# Altium PCB Micro.PcbDoc
Units mil, origin at the board's own origin, x right, y up, seen from the top; angles counter-clockwise.
Board outline 3937.01 x 3937.01 mil, 2 copper layers (Top Layer, Bottom Layer); 81 components, 145 nets, 413 pads, 89 vias.
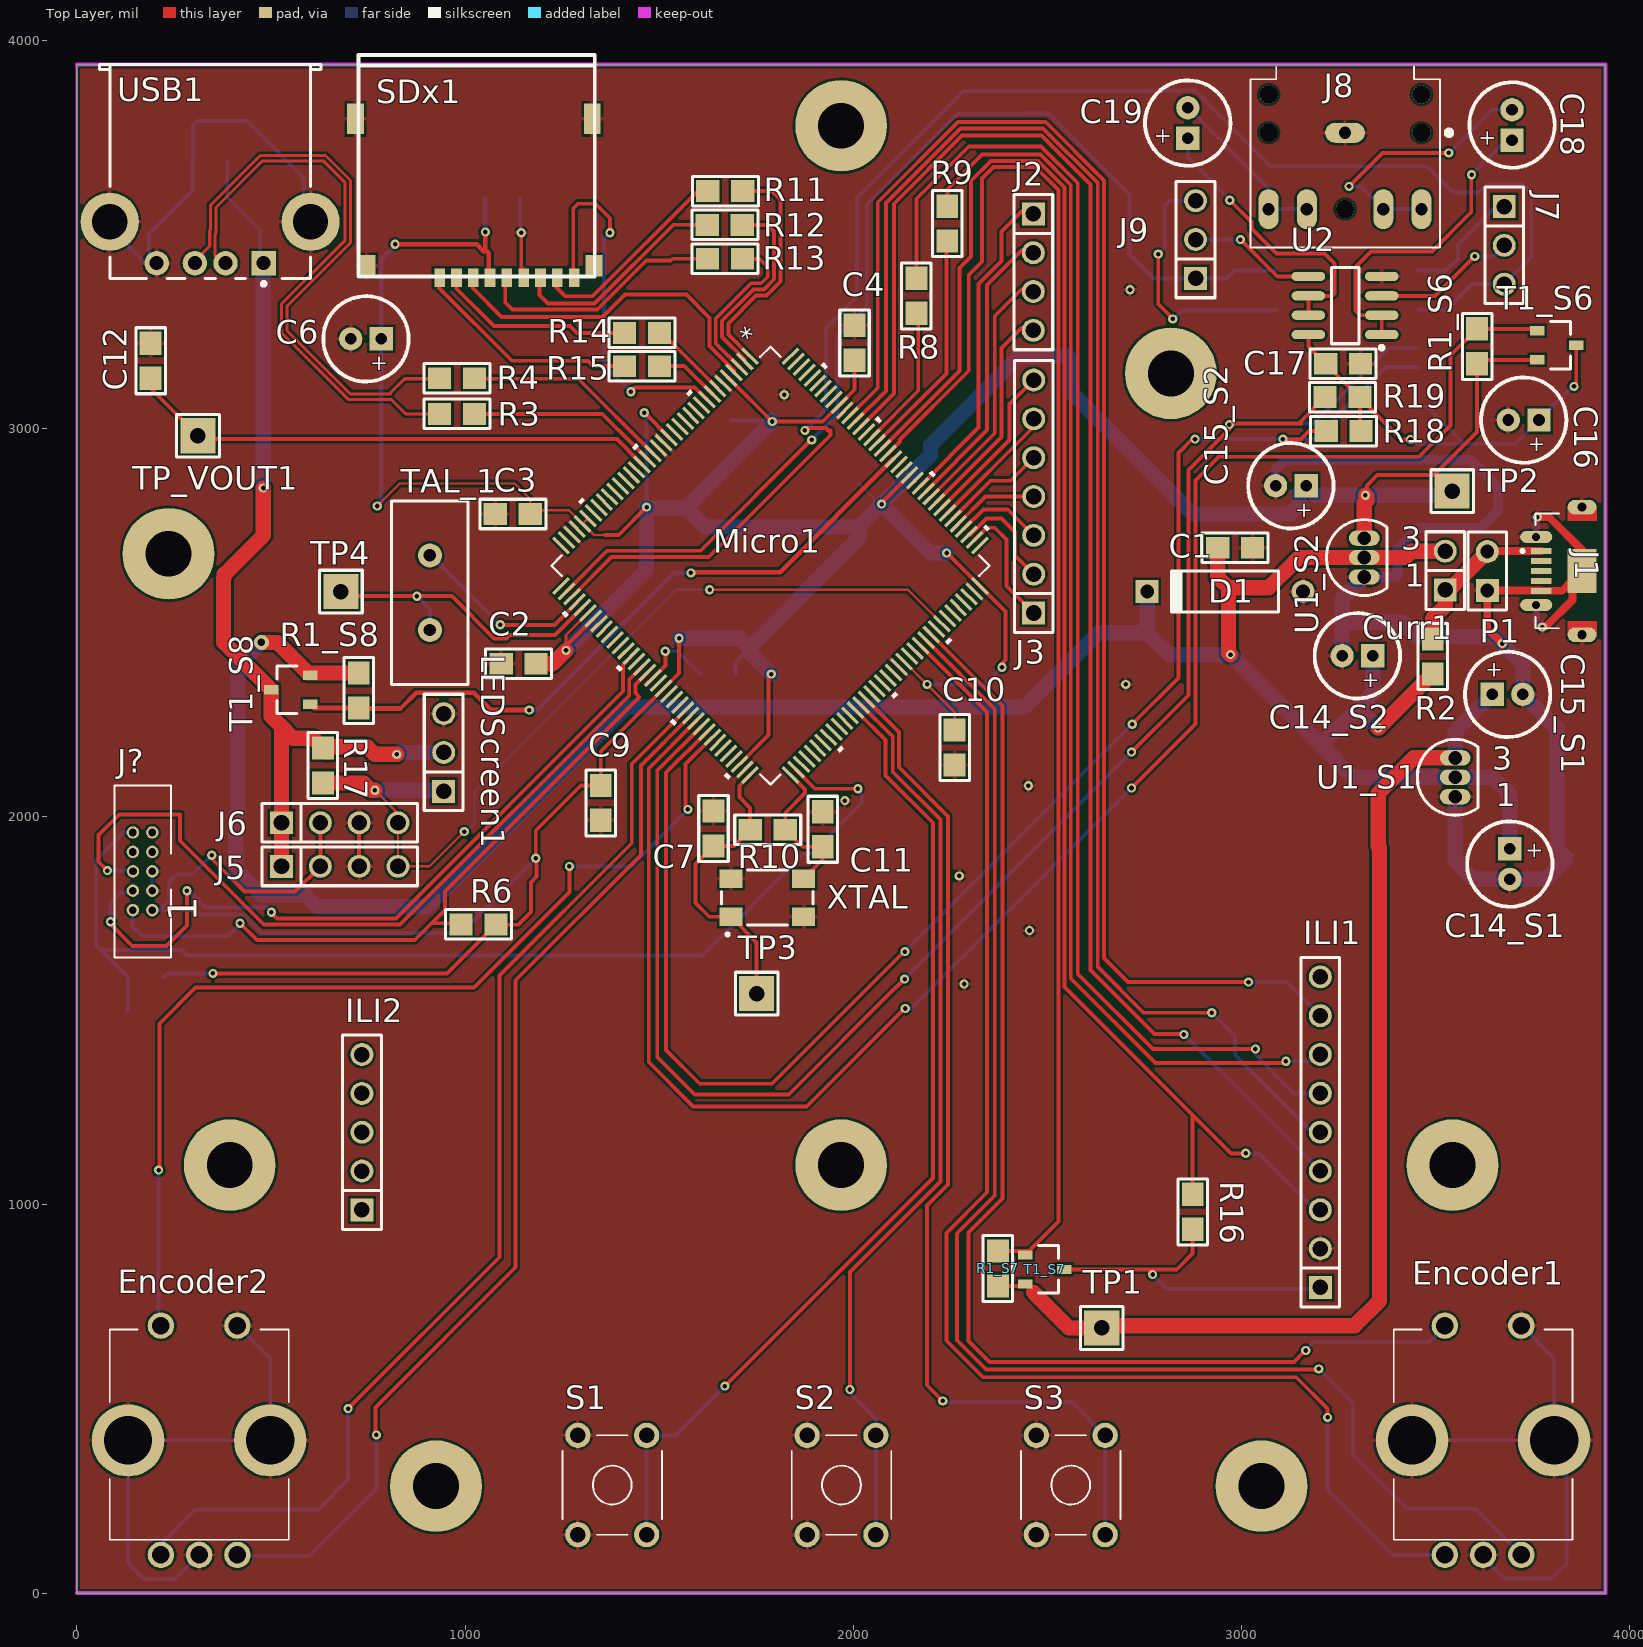
[diagram p0: Top Layer view]
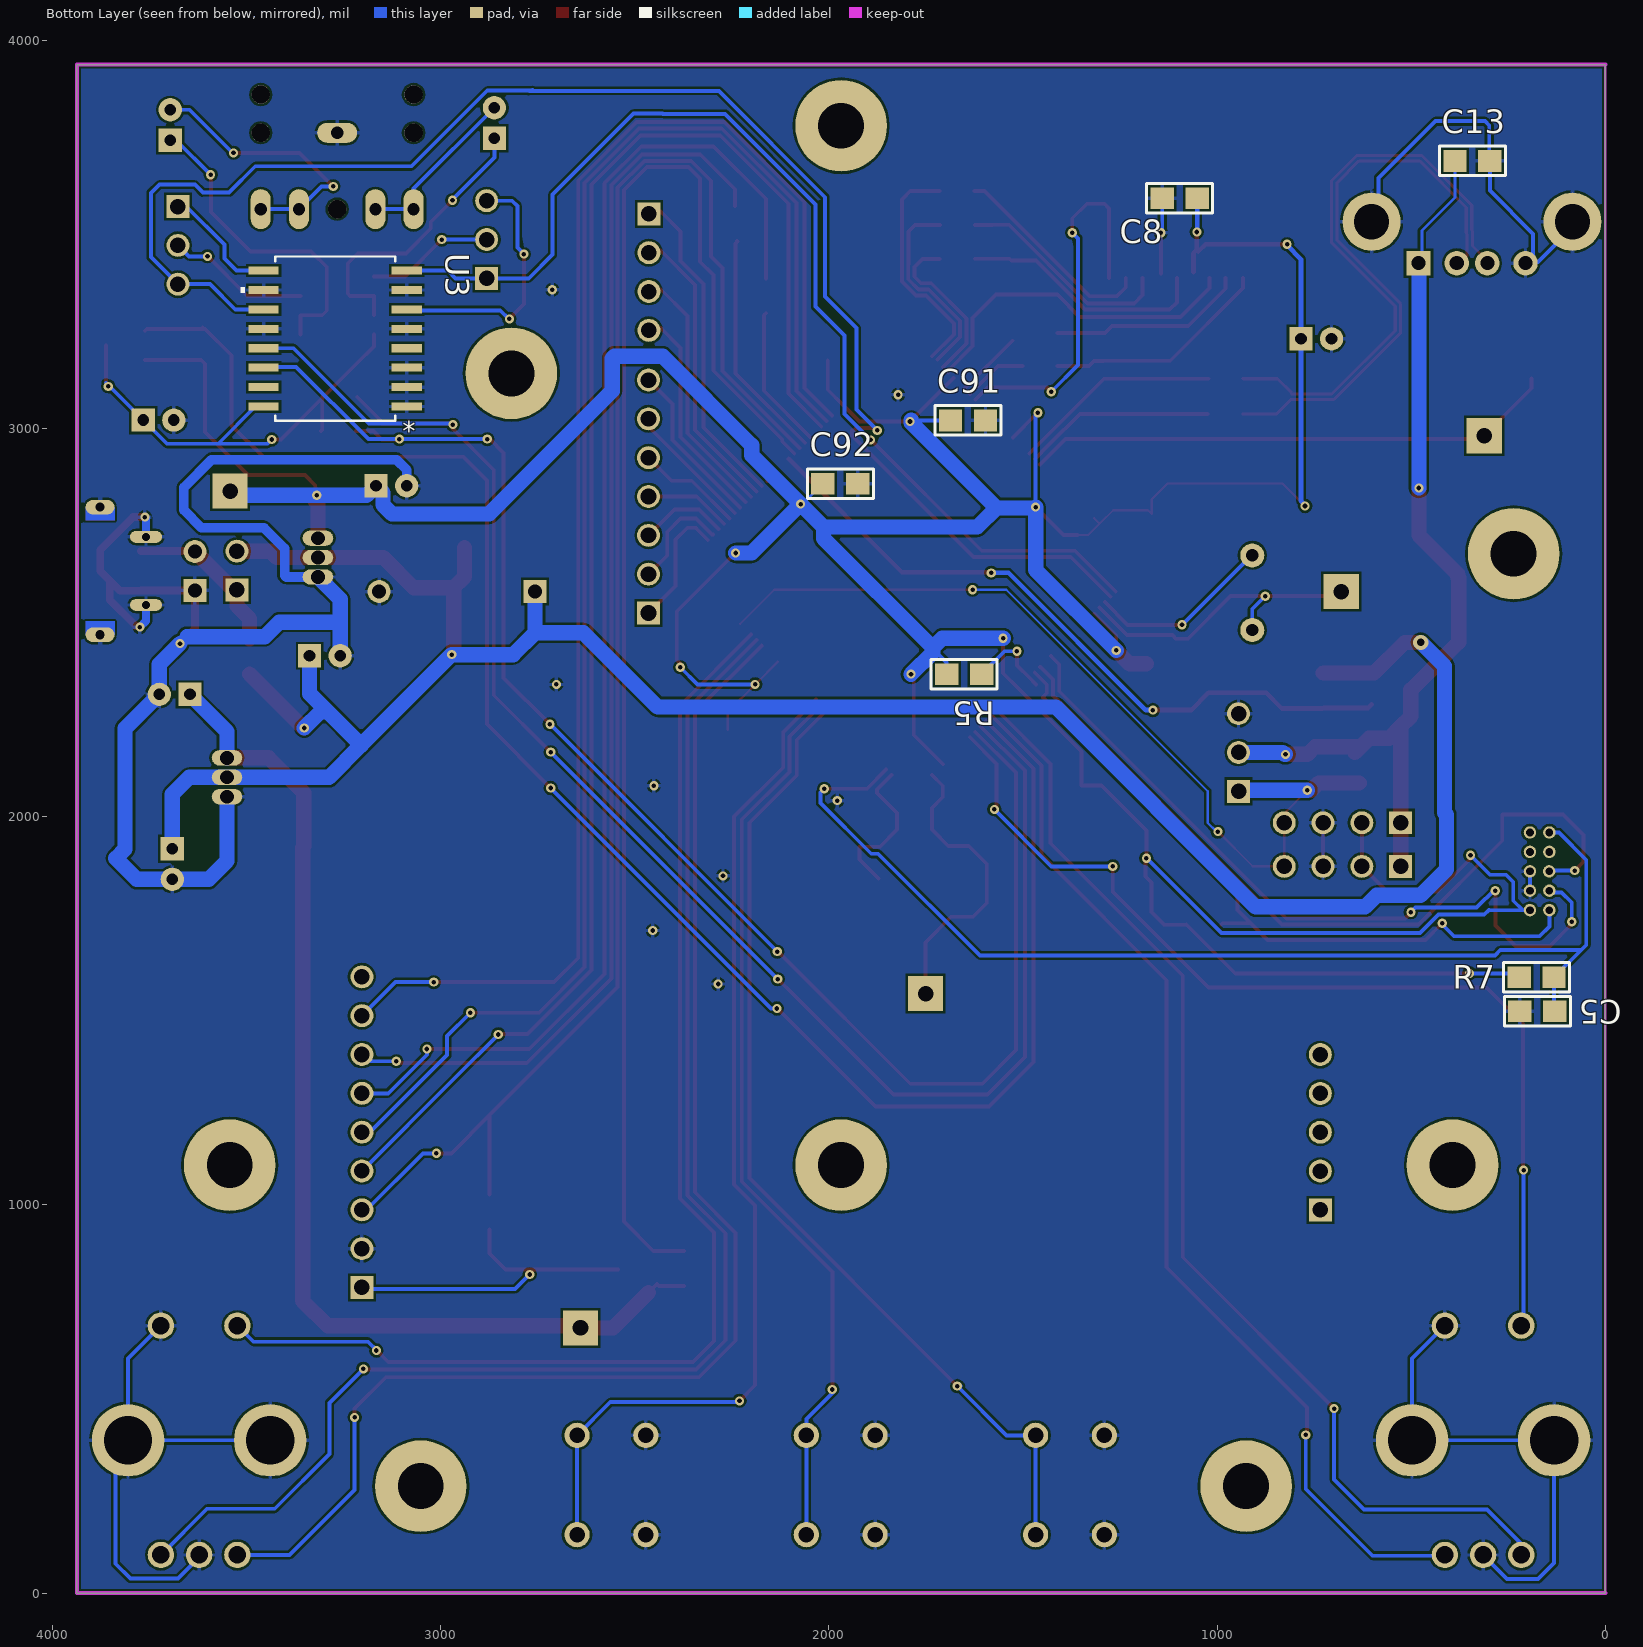
[diagram p1: Bottom Layer view, seen from below]

## Layer stack, top to bottom
Top Layer: signal copper 1.4
Dielectric: dielectric 12.6, FR-4, Dk 4.8
Bottom Layer: signal copper 1.4

## Board outline
0,0 1.5,1.5 2.99,0 3937.01,0 3937.01,3937.01 0,3937.01

## Design rules (kind name [scope] priority, off if disabled: settings)
Clearance [All] p1: gap=6
HoleSize [All] p1: absolutevalues=TRUE maxlimit=1000 minlimit=3.94 maxpercent=80.000 minpercent=20.000
PolygonConnect [All] p1: connectstyle=Relief reliefconductorwidth=10 reliefentries=4 polygonreliefangle="90 Angle"
RoutingVias [All] p1: holewidth=11.81 width=23.62 viastyle="Through Hole" minholewidth=11.81 minwidth=23.62 maxholewidth=11.81 maxwidth=23.62
SilkscreenOverComponentPads SilkToSolderMaskClearance [IsPad] p1: minsilkscreentomaskgap=10
SolderMaskExpansion [All] p1: expansion=4
Width [All] p1: maxlimit=39.37 minlimit=6 preferedwidth=6
26 further rules are at their usual default settings.

## Classes and differential pairs
channel class PowerControl: U_PowerControl1 U_PowerControl2
component class S4: Encoder1 Encoder2 S1 S2 S3
component class S1: C14_S1 C15_S1 U1_S1
component class S3: ILI1 ILI2 J5 J6 LEDScreen1 R16 R17
component class Micro: C1 C2 C3 C4 C5 C6 C7 C8 C9 C10 C11 C12 C13 C91 C92 Curr1 D1 J1 J2 J3 J? Micro1 P1 R2 R3 R4 R5 R6 R7 R8 R9 R10 R11 R12 R13 R14 R15 SDx1 TAL_1 TP1 TP2 TP3 TP4 TP_VOUT1 USB1 XTAL
component class S8: R1_S8 T1_S8
channel class ControlVCC: BTPwrCtrl ILIPwrCtrl OutputVccCtrl
net class PTE[0..12]: PTE0 PTE1 PTE2 PTE3 PTE4 PTE5 PTE6 PTE7 PTE8 PTE9 PTE10 PTE11 PTE12 PTE24 PTE25 PTE26 PTE27 PTE28
net class PTD[0..15]: PTD0 PTD1 PTD2 PTD3 PTD4 PTD5 PTD6 PTD7 PTD8 PTD9 PTD10 PTD11 PTD12 PTD13 PTD14 PTD15
net class PTC[0..19]: PTC0 PTC1 PTC2 PTC3 PTC4 PTC5 PTC6 PTC7 PTC8 PTC9 PTC10 PTC11 PTC12 PTC13 PTC14 PTC15 PTC16 PTC17 PTC18 PTC19
net class PTB[0..23]: PTB0 PTB1 PTB2 PTB3 PTB4 PTB5 PTB6 PTB7 PTB8 PTB9 PTB10 PTB11 PTB16 PTB17 PTB18 PTB19 PTB20 PTB21 PTB22 PTB23
net class PTA[0..29]: PTA0 PTA1 PTA2 PTA3 PTA4 PTA5 PTA6 PTA7 PTA8 PTA9 PTA10 PTA11 PTA12 PTA13 PTA14 PTA15 PTA16 PTA17 PTA18 PTA19 PTA24 PTA25 PTA26 PTA27 PTA28 PTA29
component class S2: C14_S2 C15_S2 U1_S2
component class S6: R1_S6 T1_S6
component class S7: R1_S7 T1_S7
component class S5: C16 C17 C18 C19 J7 J8 J9 R18 R19 U2 U3

## Components (designator, comment, footprint, x,y, rotation, side; value= is the part's Value field where it differs from the comment)
C1 "1.0UF" 0805 2983.27,2692.91 r0 top
C2 "0.1uF" 0805 1137.8,2393.7 r180 top
C3 "0.1uF" 0805 1123.03,2779.53 r180 top
C4 "0.1uF" 0805 2002.95,3220.47 r90 top
C5 "0.1uF" 0805 175.2,1499.02 r0 bottom
C6 "10uF" CAP100RP 744.72,3230.63 r180 top
C7 "27pF" 0805 1639.76,1969.49 r90 top
C8 "0.1uF" 0805 1096.46,3592.52 r0 bottom
C9 "0.1uF" 0805 1349.41,2035.43 r270 top
C10 "0.1uF" 0805 2260.83,2178.15 r270 top
C11 "27pF" 0805 1921.26,1967.52 r90 top
C12 "2.2uF" 0805 189.96,3174.21 r90 top
C13 "10uF DNP" 0805 342.52,3688.98 r180 bottom
C14_S1 "10uF" CAP100RP 3690.94,1877.95 r270 top (schematic designator C14)
C14_S2 "10uF" CAP100RP 3298.23,2414.37 r180 top (schematic designator C14)
C15_S1 "10uF" CAP100RP 3685.04,2314.96 r0 top (schematic designator C15)
C15_S2 "10uF" CAP100RP 3126.97,2852.36 r180 top (schematic designator C15)
C16 "CAPPOL" CAP100RP 3726.5,3021.5 r180 top
C17 "CAP" 0805 3261.5,3166.5 r0 top
C18 "10uF" CAP100RP 3696.5,3781.5 r90 top
C19 "10uF" CAP100RP 2861.5,3786.5 r90 top
C91 "0.1uF" 0805 1641.73,3020.67 r180 bottom
C92 "0.1uF" 0805 1970.47,2857.28 r180 bottom
Curr1 "JUMPER" JUMPER2 3524.61,2633.86 r90 top
D1 "Tranzorb" DO-7 2957.68,2579.72 r180 top
Encoder1 "EN11-HSM1BF20" EN11HSM1BF20 3622.05,393.7 r0 top
Encoder2 "EN11-HSM1BF20" EN11HSM1BF20 314.96,393.7 r0 top
ILI1 "CON9" SIP9 3202.76,787.4 r90 top
ILI2 "CON5" SIP5 734.25,987.2 r90 top
J1 "47590-0001" *MOLEX_47590-0001_47590-0001(Primary) 3876.97,2632.87 r90 top
J2 "GPIO" SIP4 2463.58,3402.56 r270 top
J3 "I2S" SIP7 2464.57,2524.61 r90 top
J5 "CON4" SIP4 677.17,1872.05 r0 top
J6 "CON4" SIP4 677.17,1984.25 r0 top
J7 "JUMPER" JUMPER3 3676.5,3471.5 r270 top
J8 "SJ1-3525N" *CUI_SJ1-3525N 3266.5,3761.5 r270 top
J9 "JUMPER" JUMPER3 2881.5,3486.5 r90 top
J? "SWD" *2X10_BOXHEADER 169.29,1859.25 r90 top
LEDScreen1 "CON3" SIP3 944.88,2165.35 r90 top
Micro1 "Part Number: MK64FN1M0VLQ12" LQFP-144_20X20X1 1786.5,2646.5 r315 top
P1 "Header 2" HDR1X2 3632.87,2582.68 r90 top
R1_S6 "10k" 0805 3606.5,3211.5 r270 top (schematic designator R1)
R1_S7 "10k" 0805 2372.4,836.38 r270 top (schematic designator R1)
R1_S8 "10k" 0805 726.38,2324.8 r90 top (schematic designator R1)
R2 "0" 0805 3492.13,2412.4 r270 top
R3 "33" 0805 979.33,3037.4 r180 top
R4 "33" 0805 979.33,3128.94 r180 top
R5 "10k" 0805 1651.57,2367.13 r0 bottom
R6 "10k" 0805 1034.45,1722.44 r0 top
R7 "10k" 0805 177.17,1586.61 r180 bottom
R8 "22" 0805 2162.4,3341.54 r270 top
R9 "22" 0805 2242.13,3527.56 r270 top
R10 "1M" 0805 1779.53,1966.54 r180 top
R11 "22" 0805 1670.28,3611.22 r0 top
R12 "22" 0805 1669.02,3524.11 r0 top
R13 "22" 0805 1669.29,3437.01 r0 top
R14 "22" 0805 1455.71,3246.06 r0 top
R15 "22" 0805 1455.71,3160.43 r0 top
R16 "4k7" 0805 2874.02,982.28 r270 top
R17 "1k" 0805 633.86,2131.89 r90 top
R18 "4k7" 0805 3262.8,2993.11 r0 top
R19 "4k7" 0805 3259.84,3080.71 r0 top
S1 "TACT SWITCH" TACTSWITCH 1378.94,278.54 r0 top
S2 "TACT SWITCH" TACTSWITCH 1969.49,278.54 r0 top
S3 "TACT SWITCH" TACTSWITCH 2560.04,278.54 r0 top
SDx1 "Component_1" SD 725.39,3391.73 r0 top
T1_S6 "MOSFET P" SOT23 3761.5,3251.5 r270 top (schematic designator T1)
T1_S7 "MOSFET P" SOT23 2442.4,871.38 r270 top (schematic designator T1)
T1_S8 "MOSFET P" SOT23 601.38,2289.37 r90 top (schematic designator T1)
TAL_1 "32.768KHZ" "CRISTAL PERFIL" 909.45,2576.77 r270 top
TP1 "3V3_LCD" TPTH 2639.76,683.07 r90 top
TP2 "3V3" TPTH 3542.32,2838.58 r180 top
TP3 "CLK" TPTH 1750.98,1544.29 r0 top
TP4 "RTC" TPTH 680.12,2579.72 r270 top
TP_VOUT1 "TP" TPTH 312.01,2981.3 r90 top
U1_S1 "HT7130A-1" BCY-W3/E4 3550.2,2101.38 r0 top (schematic designator U1)
U1_S2 "HT7130A-1" BCY-W3/E4 3315.94,2667.32 r0 top (schematic designator U1)
U2 "MCP6002T-I/SN" SOIC-SN8_N 3266.5,3316.5 r180 top
U3 "Part Number: ds1807s+" 21-0042B_16 3271.5,3231.5 r0 bottom
USB1 "440068-1" 440068 343.5,3937.01 r90 top
XTAL "ABMM2-12.000MHZ-E2-T" *OSCCC600X360X120 1778.54,1791.34 r90 top

## Footprints (in the part's own frame and the unit in brackets; to place one, negate y for a bottom-side part, rotate by r counter-clockwise, add the part's x,y. Pads: shape width x height; smd on the part's side, far side on the other; paste and mask are expansions set on the pad)
21-0042B_16 [mil]
  rect 78x21 smd paste+0 mask+0: 1(-184.5,175) 2(-184.5,125) 3(-184.5,75) 4(-184.5,25) 5(-184.5,-25) 6(-184.5,-75) 7(-184.5,-125) 8(-184.5,-175) 9(184.5,-175) 10(184.5,-125) 11(184.5,-75) 12(184.5,-25) 13(184.5,25) 14(184.5,75) 15(184.5,125) 16(184.5,175)
  silkscreen extent -154,-212 244,212, body extent 0,0 10,10, height 10
0805 [mil] "Pasivo 0805"
  rect 60x56 smd: 1(-45,0) 2(45,0)
  silkscreen extent -85,-38 85,38, body extent -40,-24 39,25, height 15
440068 [mm] "Connector; USB1.1, Reverse Type, Thru-Hole; 4 Position; Right Angle"
  rect 1.6x1.6 hole 0.92: 1(-12.99,-3.5)
  round 1.6 hole 0.92: 2(-12.99,-1) 3(-12.99,1) 4(-12.99,3.5)
  round 3.8 hole 2.3: 5(-10.28,6.57) 6(-10.28,-6.57)
  silkscreen extent -14.46,-7.25 0,7.25
*2X10_BOXHEADER [mil]
  round 32 hole 20: 1(-100,-25) 2(-100,25) 3(-50,-25) 4(-50,25) 5(0,-25) 6(0,24.61) 7(50,-25) 8(50,25) 9(100,-25) 10(100,25)
  silkscreen extent -221,-73 221,73
*CUI_SJ1-3525N [mm]
  oval 1.308x2.616 hole 0.8: 1(0,0)
  oval 2.616x1.308 hole 0.8: 2(5,-5) 3(5,5) 10(5,-2.5) 11(5,2.5)
  round 1.2 hole 1.2 unplated: None(-2.5,5) None(-2.5,-5) None(0,5) None(0,-5) None(5,0)
  silkscreen extent -4.3,-6.2 7.5,6.97
*MOLEX_47590-0001_47590-0001(Primary) [mm]
  rect 0.4x1.35 smd: 1(1.3,2.675) 2(0.65,2.675) 3(0,2.675) 4(-0.65,2.675) 5(-1.3,2.675)
  oval 0.771x2.1 hole 0.523: SH1(-2.225,3) SH2(2.225,3)
  oval 0.95x1.9 hole 0.6: SH3(-4.175,0) SH4(4.175,0)
  rect 2.9x1.9 smd: SH5(0,0)
  Top Layer region: 3.3,0.95 4.175,0.95 4.175,-0.95 3.3,-0.95
  Top Layer region: -4.177,0.95 -3.3,0.95 -3.3,-0.951 -4.177,-0.951
  Bottom Layer region: 3.305,0.95 4.175,0.95 4.175,-0.951 3.305,-0.951
  Bottom Layer region: -4.177,0.95 -3.3,0.95 -3.3,-0.95 -4.177,-0.95
  silkscreen extent -3.75,1.5 3.75,4
*OSCCC600X360X120 [mm]
  rect 1.21x1.5 smd: 1(-1.25,2.375) 2(-1.25,-2.375) 3(1.25,-2.375) 4(1.25,2.375)
  silkscreen extent -2.5,-3 1.8,3
BCY-W3/E4 [mm] "TO, Flat Index; 3 In-Line, Axial Leads; Body Dia. 4.7mm; Lead Dia. 0.51 mm (max)"
  oval 2x1 hole 0.9: 1(0,-1.27) 2(0,0) 3(0,1.27)
  silkscreen extent -2.48,-2.48 1.5,2.48
CAP100RP [mil] "Body diameter 5mm"
  rect 60x60 hole 30: 1(-39.37,0)
  round 60 hole 30: 2(39.37,0)
  silkscreen extent -110,-110 110,110, body extent -99,-99 99,100, height 454
"CRISTAL PERFIL" [mil]
  round 62 hole 32: 1(-96.06,0) 2(96.06,0)
  silkscreen extent -236,-98 236,98, body extent -223,-91 223,92, height 138
DO-7 [mm] "Diode, Axial; Body 7 x 2.7 mm (LxDia. max), Lead Dia. 0.53 mm (max)"
  round 1.5 hole 0.9: 1(-5.1,0)
  rect 1.5x1.5 hole 0.9: 2(5.1,0)
  silkscreen extent -3.5,-1.35 3.6,1.35
EN11HSM1BF20 [mm]
  round 1.725 hole 1.15: 1(-2.5,-7.5) 2(0,-7.5) 3(2.5,-7.5) 4(-2.5,7.5) 5(2.5,7.5)
  round 4.743 hole 3.162: 6(-4.65,0) 7(4.65,0)
  silkscreen extent -5.85,-6.5 5.85,7.25
HDR1X2 [mm] "Connector; Header; 2 Position"
  rect 1.5x1.5 hole 0.9: 1(0,0)
  round 1.5 hole 0.9: 2(2.54,0)
  silkscreen extent -1.27,-1.27 3.81,1.27
JUMPER2 [mm]
  rect 1.5x1.5 hole 1.016: 1(-1.27,0)
  round 1.5 hole 1.016: 2(1.27,0)
  silkscreen extent -2.54,-1.27 2.54,1.27, body extent -2.46,-1.27 2.54,1.27, height 9.5
JUMPER3 [mm]
  rect 1.5x1.5 hole 1.016: 1(-2.54,0)
  round 1.5 hole 1.016: 2(0,0) 3(2.54,0)
  silkscreen extent -3.81,-1.27 3.81,1.27, body extent -3.81,-1.3 3.81,1.27, height 16.15
LQFP-144_20X20X1 [mm]
  rect 1.461x0.219 smd paste+0 mask+0: 1(-10.625,8.75) 2(-10.625,8.25) 3(-10.625,7.75) 4(-10.625,7.25) 5(-10.625,6.75) 6(-10.625,6.25) 7(-10.625,5.75) 8(-10.625,5.25) 9(-10.625,4.75) 10(-10.625,4.25) 11(-10.625,3.75) 12(-10.625,3.25) 13(-10.625,2.75) 14(-10.625,2.25) 15(-10.625,1.75) 16(-10.625,1.25) 17(-10.625,0.75) 18(-10.625,0.25) 19(-10.625,-0.25) 20(-10.625,-0.75) 21(-10.625,-1.25) 22(-10.625,-1.75) 23(-10.625,-2.25) 24(-10.625,-2.75) 25(-10.625,-3.25) 26(-10.625,-3.75) 27(-10.625,-4.25) 28(-10.625,-4.75) 29(-10.625,-5.25) 30(-10.625,-5.75) 31(-10.625,-6.25) 32(-10.625,-6.75) 33(-10.625,-7.25) 34(-10.625,-7.75) 35(-10.625,-8.25) 36(-10.625,-8.75) 73(10.625,-8.75) 74(10.625,-8.25) 75(10.625,-7.75) 76(10.625,-7.25) 77(10.625,-6.75) 78(10.625,-6.25) 79(10.625,-5.75) 80(10.625,-5.25) 81(10.625,-4.75) 82(10.625,-4.25) 83(10.625,-3.75) 84(10.625,-3.25) 85(10.625,-2.75) 86(10.625,-2.25) 87(10.625,-1.75) 88(10.625,-1.25) 89(10.625,-0.75) 90(10.625,-0.25) 91(10.625,0.25) 92(10.625,0.75) 93(10.625,1.25) 94(10.625,1.75) 95(10.625,2.25) 96(10.625,2.75) 97(10.625,3.25) 98(10.625,3.75) 99(10.625,4.25) 100(10.625,4.75) 101(10.625,5.25) 102(10.625,5.75) 103(10.625,6.25) 104(10.625,6.75) 105(10.625,7.25) 106(10.625,7.75) 107(10.625,8.25) 108(10.625,8.75)
  rect 0.219x1.461 smd paste+0 mask+0: 37(-8.75,-10.625) 38(-8.25,-10.625) 39(-7.75,-10.625) 40(-7.25,-10.625) 41(-6.75,-10.625) 42(-6.25,-10.625) 43(-5.75,-10.625) 44(-5.25,-10.625) 45(-4.75,-10.625) 46(-4.25,-10.625) 47(-3.75,-10.625) 48(-3.25,-10.625) 49(-2.75,-10.625) 50(-2.25,-10.625) 51(-1.75,-10.625) 52(-1.25,-10.625) 53(-0.75,-10.625) 54(-0.25,-10.625) 55(0.25,-10.625) 56(0.75,-10.625) 57(1.25,-10.625) 58(1.75,-10.625) 59(2.25,-10.625) 60(2.75,-10.625) 61(3.25,-10.625) 62(3.75,-10.625) 63(4.25,-10.625) 64(4.75,-10.625) 65(5.25,-10.625) 66(5.75,-10.625) 67(6.25,-10.625) 68(6.75,-10.625) 69(7.25,-10.625) 70(7.75,-10.625) 71(8.25,-10.625) 72(8.75,-10.625) 109(8.75,10.625) 110(8.25,10.625) 111(7.75,10.625) 112(7.25,10.625) 113(6.75,10.625) 114(6.25,10.625) 115(5.75,10.625) 116(5.25,10.625) 117(4.75,10.625) 118(4.25,10.625) 119(3.75,10.625) 120(3.25,10.625) 121(2.75,10.625) 122(2.25,10.625) 123(1.75,10.625) 124(1.25,10.625) 125(0.75,10.625) 126(0.25,10.625) 127(-0.25,10.625) 128(-0.75,10.625) 129(-1.25,10.625) 130(-1.75,10.625) 131(-2.25,10.625) 132(-2.75,10.625) 133(-3.25,10.625) 134(-3.75,10.625) 135(-4.25,10.625) 136(-4.75,10.625) 137(-5.25,10.625) 138(-5.75,10.625) 139(-6.25,10.625) 140(-6.75,10.625) 141(-7.25,10.625) 142(-7.75,10.625) 143(-8.25,10.625) 144(-8.75,10.625)
  silkscreen extent -11.86,-11.86 11.86,11.86, body extent 0,0 0.25,0.25, height 0.25
SD [mm]
  rect 0.7x1.2 smd: 1(5.31,-0.1) 2(6.41,-0.1) 3(7.51,-0.1) 4(8.61,-0.1) 5(9.71,-0.1) 6(10.81,-0.1) 7(11.91,-0.1) 8(13.01,-0.1) 9(14.11,-0.1)
  rect 1.1x1.4 smd: 10(0.55,0.7) 14(15.4,0.7)
  rect 1.1x2 smd: 11(-0.2,10.3) 12(15.3,10.3)
  silkscreen extent -0.01,0 15.46,14.49
SIP3 [mm]
  rect 1.5x1.5 hole 1.016: 1(-2.54,0)
  round 1.5 hole 1.016: 2(0,0) 3(2.54,0)
  silkscreen extent -3.81,-1.27 3.81,1.27, body extent -3.81,-1.3 3.81,1.24, height 8.38
SIP4 [mm]
  rect 1.5x1.5 hole 1.016: 1(-3.81,0)
  round 1.5 hole 1.016: 2(-1.27,0) 3(1.27,0) 4(3.81,0)
  silkscreen extent -5.08,-1.27 5.08,1.27, body extent -5.08,-1.27 5.08,1.27, height 8.38
SIP5 [mm]
  rect 1.5x1.5 hole 1.016: 1(0,0)
  round 1.5 hole 1.016: 2(2.54,0) 3(5.08,0) 4(7.62,0) 5(10.16,0)
  silkscreen extent -1.27,-1.27 11.43,1.27, body extent -1.27,-1.27 11.43,1.27, height 8.38
SIP7 [mm]
  rect 1.5x1.5 hole 1.016: 1(0,0)
  round 1.5 hole 1.016: 2(2.54,0) 3(5.08,0) 4(7.62,0) 5(10.16,0) 6(12.7,0) 7(15.24,0)
  silkscreen extent -1.27,-1.27 16.51,1.27, body extent -1.27,-1.3 16.51,1.27, height 8.38
SIP9 [mm]
  rect 1.5x1.5 hole 1.016: 1(0,0)
  round 1.5 hole 1.016: 2(2.54,0) 3(5.08,0) 4(7.62,0) 5(10.16,0) 6(12.7,0) 7(15.24,0) 8(17.78,0) 9(20.32,0)
  silkscreen extent -1.27,-1.27 21.59,1.27, body extent -1.27,-1.3 21.59,1.24, height 8.38
SOIC-SN8_N [mm] "SOIC, 8-Leads, Body 4.9x3.8mm, Pitch 1.27mm, IPC Medium Density"
  oval 2.2x0.6 smd: 1(-2.4,1.905) 2(-2.4,0.635) 3(-2.4,-0.635) 4(-2.4,-1.905) 5(2.4,-1.905) 6(2.4,-0.635) 7(2.4,0.635) 8(2.4,1.905)
  silkscreen extent -2.53,-2.5 0.9,2.88, body extent -2,-2.5 2,2.5, height 1.75
SOT23 [mm]
  rect 0.6x0.95 smd: 1(0,0) 2(0.95,2.55) 3(1.9,0)
  silkscreen extent -0.6,0.87 2.5,2.18, body extent -0.53,-0.25 2.47,2.88, height 1
TACTSWITCH [mil]
  round 65 hole 40: 1(-88.58,-127.95) 2(-88.58,127.95) 3(88.58,-127.95) 4(88.58,127.95)
  silkscreen extent -128,-128 128,128, body extent -120,-156 124,156, height 276
TPTH [mm]
  rect 2.3x2.3 hole 1.016: 1(0,0)
  silkscreen extent -1.4,-1.4 1.4,1.4, body extent -1.27,-1.27 1.27,1.27, height 6.04

## Part data
C1 C2 C3 C4 C5 C7 C8 C9 C10 C11 C12 C13 C91 C92: library part CAP
C6 C14_S1 C14_S2 C15_S1 C15_S2 C18 C19: library part CAPPOL
D1: "Transient Voltage Suppression (TVS) Diode"
Encoder1 Encoder2: "Switch"
J1: "0.65mm _.0256_ Pitch Micro-USB AB Receptacle, Right Angle, Bottom Mount, SMT, Lead Free"
J2: library part CON4
J3: library part CON7
J7 J9: library part JUMPER3
J?: "3M_TM_ ScotchCode_TM_ Wire Marker Write-On Dispenser SWD, Wire O.D. 0.09 to 0.31 Inches"
Micro1: library part MK64FN1M0VLQ12, "No Description Available"
P1: "Header, 2-Pin"
R1_S6 R1_S7 R1_S8 R2 R3 R4 R5 R6 R7 R8 R9 R10 R11 R12 R13 R14 R15 R16 R17 R18 R19: library part RES
TAL_1: library part CRISTAL
TP1 TP2 TP3 TP4: library part TP
U1_S1 U1_S2: "3.0V 30mA Low Power,  Low Dropout Voltage (LDO) Regulator"
U2: "1 MHz, Low-Power Operational Amplifier, 8-Pin SOIC, Industrial Temperature, Tape and Reel"
U3: library part ds1807s+, "No Description Available"
USB1: "USB 1.1, Right Angle, Thru-Hole, Reverse Type, Receptacle, 4 Position, Black"
XTAL: library part Component_1

## Free pads (board coordinates)
  round 236.22 hole 118.11: 0(236.22,2677.17) 0(393.7,1102.36) 0(925.2,275.59) 0(1968.5,1102.36) 0(1968.5,3779.53) 0(2817.91,3141.73) 0(3051.18,275.59) 0(3543.31,1102.36)

## Via types
v1: diameter 23.62, hole 11.81, Top Layer to Bottom Layer, 88 vias
v2: diameter 39.37, hole 19.68, Top Layer to Bottom Layer, 1 vias

## Nets (pads, with @x,y where several pads share a name; then routed paths per layer and width w, separated by ;. In a path a pad name is that pad's centre, name@x,y a point inside that pad or via, vN(x,y) a via of type N, cw(c..) or ccw(c..) an arc to the next point about the centre after c; other vN are vias at no path point)
5VCTRL: C13.1 J5.1 J6.1 LEDScreen1.2 R17.2 T1_S8.2 USB1.1 | length 2428.4
  Top Layer w39.37: v1(480.32,2846.46) 480.32,2724.41 380.02,2624.11 380.02,2617.6 377.95,2615.54 377.95,2448.82 378.94,2448.82 T1_S8.2 500.98,2257.87 527.17,2231.69 ; J5.1 J6.1 527.17,2231.69 ; R17.2@645.39,2165.35 R17.2 ; v1(823.82,2160.43) 767.72,2160.43 748.03,2180.12 637.09,2180.12 R17.2 ; 527.17,2231.69 557.09,2201.77 608.98,2201.77 R17.2
  Bottom Layer w8: C13.1 387.52,3594.76 472.44,3509.84 USB1.1@472.44,3426.58
  Bottom Layer w39.37: USB1.1@472.44,3426.58 474.41,3424.61 480.32,3418.7 v1(480.32,2846.46) ; v1(823.82,2160.43) 825.79,2160.43 830.71,2165.35 LEDScreen1.2
DAC0_OUT: J9.1 Micro1.38 U3.8 | length 2883.9
  Top Layer w10: Micro1.38 1365.7,2685.04 1606.3,2685.04 1892.72,2971.46 v1(1892.72,2970.47)
  Bottom Layer w10: v1(1892.72,2970.47) 1959.65,3037.4 1959.65,3239.17 2034.45,3313.98 2034.45,3576.77 2267.72,3810.04 2427.16,3810.04 2428.14,3811.02 2502.95,3811.02 2711.61,3602.36 2711.61,3447.83 2772.95,3386.5 J9.1 2961.3,3386.5 2981.3,3406.5 U3.8
DAC1_OUT: J7.3 Micro1.39 U3.11 | length 4076
  Top Layer w10: Micro1.39 1376.97,2668.47 1376.97,2669.04 1627.7,2669.04 1941.93,2983.27 1940.94,2984.25 1940.94,2995.08 1935.04,2995.08 1929.13,3000.98 1881.34,3000.98 v1(1875.26,2994.91)
  Bottom Layer w10: v1(1875.26,2994.91) 1929.13,3048.78 1929.13,3258.86 2009.84,3339.57 2009.84,3595.47 2283.46,3869.09 2771.65,3869.09 2772.64,3870.08 ; 2763.67,3871.18 2764.76,3870.08 2772.64,3870.08 ; U3.11 3528.94,3306.5 3593.94,3371.5 J7.3 3746.06,3441.06 3746.06,3606.3 3724.41,3627.95 3632.87,3627.95 3612.2,3607.28 3545.28,3607.28 3477.36,3675.2 3074.8,3675.2 2879.92,3870.08 2772.64,3870.08
EXTAL32_RTC: Micro1.41 TAL_1.2 TP4.1 | length 807.5
  Top Layer w10: TP4.1 691.93,2567.91 v1(875.98,2567.91) 965.82,2567.91 1075.64,2458.09 1105.46,2458.09 1114.89,2467.52 1231.7,2467.52 Micro1.41
  Bottom Layer w10: v1(875.98,2567.91) 909.45,2534.45 TAL_1.2
K64_MICRO_USB_DNpg: Micro1.20 R3.1 | length 493.4
  Top Layer w10: R3.1 1353.35,3037.4 1432.62,2958.12 1469.47,2921.28 Micro1.20@1469.59,2921.16
K64_MICRO_USB_DPpg: Micro1.19 R4.1 | length 541.2
  Top Layer w10: R4.1@1022.36,3127.95 1291.34,3127.95 Micro1.19@1483.86,2935.43
NetC18_1: C18.1 U2.1 U2.2 | length 829.2
  Top Layer w10: U2.1 U2.2 3304.96,3291.5 3293.31,3303.15 3293.31,3415.35 3333.66,3455.71 3490.16,3455.71 3591.54,3557.09 3591.54,3652.56 v1(3592.52,3653.54)
  Bottom Layer w10: v1(3592.52,3653.54) 3681.1,3742.13 C18.1
NetC18_2: C18.2 J8.3 J8.11 | length 720.9
  Top Layer w10: v1(3276.73,3623.21) 3363.17,3709.65 v1(3533.46,3709.65)
  Bottom Layer w10: v1(3276.73,3623.21) 3306.36,3623.21 J8.11 J8.3 ; v1(3533.46,3709.65) 3531.5,3707.68 3531.5,3705.71 3646.65,3820.87 C18.2
NetC19_1: C19.1 U2.6 U2.7 | length 748.4
  Top Layer w10: v1(2969.49,3587.6) 3025.59,3531.5 3025.59,3514.76 3089.57,3450.79 3213.58,3450.79 3239.17,3425.2 3239.17,3347.44 3233.23,3341.5 U2.6 U2.7
  Bottom Layer w10: C19.1 2861.5,3697.56 2969.49,3589.57 v1(2969.49,3587.6)
NetC19_2: C19.2 J8.2 J8.10 | length 445.9
  Bottom Layer w10: C19.2 3069.65,3617.72 J8.2 J8.10
NetCurr1_1: Curr1.1 J1.1 P1.2 R2.1 | length 419
  Top Layer w20: P1.2 3634.25,2684.06 J1.1
  Top Layer w39.37: R2.1 3492.13,2509.84 3524.61,2542.32 Curr1.1 ; Curr1.1@3534.05,2583.86 P1.2
NetILI1_1: ILI1.1 R16.2 T1_S7.2 | length 871.9
  Top Layer w10: T1_S7.2 2759.53,833.98 ; v1(2770.67,820.87) 2770.67,822.83 2759.53,833.98 ; R16.2 2874.02,875 2832.99,833.98 2759.53,833.98
  Bottom Layer w10: v1(2770.67,820.87) 2808.07,783.46 ILI1.1@3198.82,783.46
NetILI1_6: ILI1.6 R8.1 | length 3513
  Top Layer w10: R8.1 2162.4,3591.54 2297.24,3726.38 2483.24,3726.38 2578.01,3631.61 2578.01,1595.22 2771.65,1401.57 v1(3035.43,1401.57)
  Bottom Layer w10: v1(3035.43,1401.57) 3035.43,1386.81 3134.84,1287.4 ILI1.6
NetILI1_7: ILI1.7 R9.1 | length 3218.1
  Top Layer w10: R9.1 2242.13,3616.14 2331.21,3705.23 2481.76,3705.23 2560.09,3626.9 2560.09,1583.65 2778.16,1365.57 3109.67,1365.57 v1(3114.17,1370.08)
  Bottom Layer w10: v1(3114.17,1370.08) 3180.71,1370.08 3200.39,1389.76 ILI1.7
NetJ7_1: J7.1 U3.9 | length 309.6
  Bottom Layer w10: U3.9 3525.59,3406.5 3557.09,3437.99 3557.09,3473.43 3655.16,3571.5 J7.1
NetJ7_2: J7.2 U2.3 | length 369.4
  Top Layer w10: U2.3 3497.99,3341.5 3599.58,3443.08 v1(3600.57,3443.08)
  Bottom Layer w10: v1(3600.57,3443.08) 3648.08,3443.08 J7.2
NetJ9_2: J9.2 U2.5 | length 329.9
  Top Layer w10: v1(2997.05,3486.22) 3091.77,3391.5 U2.5
  Bottom Layer w10: J9.2 2996.77,3486.5 v1(2997.05,3486.22)
NetJ9_3: J9.3 U3.6 | length 672.6
  Top Layer w10: v1(2785.43,3448.82) 2785.43,3320.87 2822.83,3283.46 v1(2822.83,3281.99)
  Bottom Layer w10: v1(2785.43,3448.82) 2802.17,3465.55 2802.17,3572.83 2815.83,3586.5 J9.3 ; v1(2822.83,3281.99) 2824.31,3281.99 2846.46,3304.13 3084.63,3304.13 U3.6
NetMicro1_23: Micro1.23
NetMicro1_24: Micro1.24
NetMicro1_25: Micro1.25
NetMicro1_26: Micro1.26
NetMicro1_27: Micro1.27
NetMicro1_28: Micro1.28
NetMicro1_29: Micro1.29
NetMicro1_30: Micro1.30
NetMicro1_35: Micro1.35
NetMicro1_36: Micro1.36
NetMicro1_37: Micro1.37
NetR13_1: R13.1 SDx1.5 | length 646.1
  Top Layer w10: SDx1.5@1103.35,3387.8 1103.35,3324.8 1122.3,3305.85 1340.29,3305.85 1466.52,3432.09 1529.8,3432.09 1534.73,3437.01 R13.1
OpAmpVCC: C16.1 C17.1 R18.2 R19.2 T1_S6.2 U2.8 U3.16 | length 1231.5
  Top Layer w10: U2.8 3172.01,3210.98 C17.1 R19.2@3304.84,3078.15 ; R19.2 R19.2@3304.84,3078.15 ; R18.2 3304.84,2996.06 R19.2@3304.84,3078.15 ; v1(3435.04,2971.46) 3411.54,2971.46 R19.2@3304.84,3078.15 ; v1@3861.89,3117.52 T1_S6.2
  Bottom Layer w10: v1(3435.04,2971.46) 3445.87,2960.63 3572.83,2960.63 ; U3.16 3456.59,3057.09 3476.38,3057.09 3572.83,2960.63 ; v1@3861.89,3117.52 C16.1 3705,2960.63 3572.83,2960.63
  other v1: 3856.3,3108.27
P3V3_LCD: C15_S1.1 R1_S7.2 T1_S7.3 TP1.1 U1_S1.3 | length 2808.7
  Top Layer w10: R1_S7.2 2437.21,791.38 T1_S7.3 2464.47,774.51
  Top Layer w39.37: 2464.47,774.51 2555.91,683.07 TP1.1 2645.67,688.98 3291.34,688.98 3355.32,752.95 3355.32,1920.28 3352.36,1923.23 3352.36,2061.02 3442.72,2151.38 U1_S1.3
  Bottom Layer w39.37: U1_S1.3 3550.2,2219.49 C15_S1.1
P5V_K64_USB: C1.1 C14_S1.1 C14_S2.1 Curr1.2 D1.2 R1_S8.2 R2.2 T1_S8.3 U1_S1.2 U1_S2.2 | length 6376.8
  Top Layer w39.37: v2(475.39,2448.82) 516.73,2448.82 595.75,2369.8 R1_S8.2 ; C1.1 2938.27,2617.83 2966.54,2589.57 ; v1(2971.46,2417.32) 2966.54,2422.24 2966.54,2589.57 ; v1(3351.38,2228.35) 3353.07,2228.35 R2.2 ; Curr1.2 3438.78,2683.86 3422.24,2667.32 U1_S2.2 3147.64,2667.32 3069.88,2589.57 2966.54,2589.57
  Bottom Layer w39.37: v2(475.39,2448.82) 414.37,2387.8 414.37,2009.84 409.45,2004.92 409.45,1864.17 476.38,1797.24 589.57,1797.24 619.09,1767.72 900.59,1767.72 1415.35,2282.48 2440.94,2282.48 2631.89,2473.43 2756.89,2473.43 ; D1.2 2756.89,2473.43 ; C14_S2.1 3337.6,2316.93 3290.35,2269.69 ; v1(3351.38,2228.35) 3310.04,2269.69 3290.35,2269.69 ; C14_S1.1 3690.94,2058.07 3647.64,2101.38 U1_S1.2 3287.4,2101.38 3204.72,2184.06 ; 2756.89,2473.43 2812.99,2417.32 v1(2971.46,2417.32) 3204.72,2184.06 ; 3204.72,2184.06 3290.35,2269.69
PTA0: J?.4 Micro1.50 | length 1959.7
  Top Layer w10: v1(86.61,1729.33) 86.61,1723.43 142.72,1667.32 231.3,1667.32 283.46,1719.49 v1(283.46,1809.06) ; v1(500.98,1753.94) 500,1753.94 515.75,1738.19 821.85,1738.19 1406.72,2323.06 1406.72,2391.96 Micro1.50@1428.07,2413.31
  Bottom Layer w10: v1(86.61,1729.33) 86.61,1778.54 113.19,1805.12 140.16,1805.12 J?.4 ; v1(283.46,1809.06) 283.46,1813.98 331.69,1765.75 489.17,1765.75 v1(500.98,1753.94)
PTA1: Micro1.51
PTA2: J?.6 Micro1.52 | length 2045.2
  Top Layer w10: v1(78.74,1861.22) 56.1,1883.86 56.1,1952.76 109.25,2005.91 265.75,2005.91 265.75,1937.99 481.55,1722.19 832.43,1722.19 1422.72,2312.49 1422.72,2352.84 1455.39,2385.51 Micro1.52
  Bottom Layer w10: v1(78.74,1861.22) 142.72,1861.22 J?.6
PTA3: J?.2 Micro1.53 R6.1 | length 1835.4
  Top Layer w10: v1(420.28,1725.39) 463.58,1682.09 870.29,1682.09 947.85,1759.64 947.85,1807.1 1448.1,2307.35 1448.1,2308.8 1438.72,2318.18 1438.72,2340.3 1469.83,2371.4 Micro1.53 ; 913.6,1725.39 986.5,1725.39 R6.1
  Bottom Layer w10: J?.2 143.7,1758.66 143.7,1717.52 169.29,1691.93 389.76,1691.93 420.28,1722.44 v1(420.28,1725.39)
PTA4: Micro1.54 R5.1 | length 222
  Top Layer w10: Micro1.54@1466.09,2340.01 Micro1.54 1515.75,2389.67 v1(1515.75,2426.18)
  Bottom Layer w10: v1(1515.75,2426.18) 1547.52,2426.18 R5.1
PTA5: Micro1.55
PTA6: Micro1.58
PTA7: Micro1.59
PTA8: Encoder2.1 Micro1.60 | length 2920.9
  Top Layer w10: v1(698.82,475.39) 1088.58,865.16 1088.58,1590.83 1429.13,1931.38 1429.13,2136.02 Micro1.60
  Bottom Layer w10: Encoder2.1 216.54,126.97 305.12,215.55 622.05,215.55 698.82,292.32 v1(698.82,475.39)
PTA9: Encoder2.3 Micro1.61 | length 2759.6
  Top Layer w10: v1(771.65,407.48) 768.84,410.29 768.84,478.49 1129.92,839.57 1129.92,1578.74 1452.76,1901.57 1452.76,2131.8 Micro1.61
  Bottom Layer w10: Encoder2.3 415.36,96.46 599.41,96.46 771.65,268.7 v1(771.65,407.48)
PTA10: Micro1.62 R1_S6.1 T1_S6.1 | length 4574.2
  Top Layer w10: Micro1.62 1473.17,2124.38 1473.17,1368.11 1587.35,1253.94 1879.92,1253.94 2131.89,1505.91 v1(2133.86,1505.91) ; v1(2716.54,2073.82) 2880.91,2238.19 2880.91,2866.14 2941.93,2927.17 3457.68,2927.17 3538.39,3007.87 3538.39,3188.39 R1_S6.1 R1_S6.1@3616.14,3256.5 ; R1_S6.1@3612.8,3259.84 R1_S6.1@3616.14,3256.5 ; T1_S6.1 3756.5,3256.5 R1_S6.1@3616.14,3256.5
  Bottom Layer w10: v1(2133.86,1505.91) 2148.62,1505.91 v1(2716.54,2073.82)
PTA11: Micro1.63 R19.1 U3.13 | length 4321.2
  Top Layer w10: Micro1.63 1495.08,2118.45 1495.08,1380.91 1591.54,1284.45 1833.66,1284.45 2108.76,1559.55 2109.74,1559.55 v1(2131.89,1581.69) ; v1(2716.54,2166.34) 2863.05,2312.85 2863.05,2892.58 2968.5,2998.03 v1(2968.5,3009.84) 2971.46,3012.8 3152.56,3012.8 3152.56,3018.43 R19.1
  Bottom Layer w10: v1(2131.89,1581.69) v1(2716.54,2166.34) ; v1(2968.5,3009.84) 2971.46,3012.8 3185.04,3012.8 3378.74,3206.5 U3.13
PTA12: Micro1.64 R18.1 U3.14 | length 4063.7
  Top Layer w10: Micro1.64 1517.72,2113.25 1517.72,1398.62 1604.33,1312.01 1790.35,1312.01 2125.98,1647.64 2127.95,1647.64 v1(2132.87,1652.56) ; v1(2718.5,2238.19) 2837.6,2357.28 2837.6,2937.01 2873.03,2972.44 v1(2879.92,2972.44) ; v1(3106.3,2972.44) 3107.28,2971.46 3151.57,2971.46 3173.23,2993.11 R18.1
  Bottom Layer w10: v1(2132.87,1652.56) v1(2718.5,2238.19) ; v1(2879.92,2972.44) v1(3106.3,2972.44) 3186.02,2972.44 3372.05,3158.46 3454.03,3158.46 U3.14
PTA13: Encoder2.4 Micro1.65 | length 2626.2
  Top Layer w10: v1(210.63,1089.57) 212.6,1091.54 212.6,1466.54 306.1,1560.04 1022.64,1560.04 1268.7,1806.1 v1(1268.7,1872.05) ; v1(1573.82,2018.7) 1567.91,2024.61 1567.91,2135.61 Micro1.65
  Bottom Layer w10: v1(210.63,1089.57) 210.63,694.88 Encoder2.4 ; v1(1268.7,1872.05) 1427.17,1872.05 v1(1573.82,2018.7)
PTA14: Micro1.66
PTA15: Micro1.67
PTA16: Micro1.68
PTA17: Micro1.69
PTA19: C11.1 Micro1.73 R10.1 XTAL.3 | length 394.7
  Top Layer w10: Micro1.73 1875.93,2069.88 1875.98,2069.88 1875.98,2061.02 1824.53,2009.57 R10.1 1868.54,1922.52 C11.1 1921.26,1889.76 XTAL.3
PTA24: Micro1.75
PTA25: Micro1.76
PTA26: Micro1.77
PTA27: Micro1.78
PTA28: Micro1.79
PTA29: Micro1.80
PTB0: Micro1.81
PTB1: Micro1.82
PTB2: Micro1.83
PTB3: Micro1.84
PTB4: Micro1.85 S1.3 S1.4 | length 2565
  Top Layer w10: v1@1668.31,533.46 v1(1669.29,533.46) 2204.72,1068.9 2204.72,1984.25 2082.71,2106.27 2082.71,2197.17 Micro1.85
  Bottom Layer w10: S1.3 S1.4 1542.32,406.5 v1(1669.29,533.46) v1@1660.43,533.46
PTB5: Micro1.86 S2.3 S2.4 | length 2346.6
  Top Layer w10: v1(1991.14,524.61) 1991.14,827.47 2224.41,1060.74 2224.41,1992.41 2101.38,2115.44 2101.38,2206.34 Micro1.86@2019.65,2288.07
  Bottom Layer w10: v1(1991.14,524.61) 1991.14,515.75 2058.07,448.82 S2.4 S2.3
PTB6: Micro1.87 S3.3 S3.4 | length 2644.2
  Top Layer w10: Micro1.87 2117.38,2218.18 2117.38,2127.28 2244.09,2000.56 2244.09,1052.59 2189.96,998.46 2189.96,535.43 v1(2230.32,495.08)
  Bottom Layer w10: v1(2230.32,495.08) 2233.27,492.13 2562.99,492.13 S3.4 S3.3
PTB7: Micro1.88
PTB8: Micro1.89
PTB9: Micro1.90
PTB10: Micro1.91
PTB11: Micro1.92
PTB16: Micro1.95
PTB17: Micro1.96
PTB18: Encoder1.1 Micro1.97 | length 3540.3
  Top Layer w10: Micro1.97 2344.49,2269.46 2344.49,1032.48 2240.16,928.15 2240.16,650.03 2334.09,556.1 3140.75,556.1 3221.46,475.39 v1(3221.46,452.76)
  Bottom Layer w10: v1(3221.46,452.76) 3221.46,265.75 3388.78,98.43 Encoder1.1
PTB19: Encoder1.3 Micro1.98 | length 3679.3
  Top Layer w10: Micro1.98 2364.17,2277.61 2364.17,1024.33 2266.73,926.88 2266.73,651.3 2342.24,575.79 3196.85,575.79 v1(3198.82,577.76)
  Bottom Layer w10: v1(3198.82,577.76) 3286.42,490.16 3286.42,358.27 3427.17,217.52 3601.38,217.52 Encoder1.3
PTB20: Encoder1.4 Micro1.99 | length 3222.1
  Top Layer w10: Micro1.99 2383.86,2285.76 2383.86,1016.17 2296.26,928.57 2296.26,649.61 2350.39,595.47 3134.84,595.47 3165.35,625.98 v1(3165.35,625)
  Bottom Layer w10: v1(3165.35,625) 3165.35,625.98 3187.01,647.64 3482.28,647.64 Encoder1.4
PTB21: Micro1.100
PTB22: J5.4 J6.4 LEDScreen1.1 Micro1.101 R17.1 | length 2321
  Top Layer w6: v1(767.72,2067.91) 827.17,2008.46 J6.4 J5.4 908.46,1872.05 v1(998.03,1961.61) ; v1(1629.92,2584.65) 2140.65,2584.65 Micro1.101
  Top Layer w39.37: R17.1 738.9,2086.89 757.87,2067.91 v1(767.72,2067.91)
  Bottom Layer w6: v1(998.03,1961.61) 1001.97,1961.61 1024.1,1983.75 1024.1,2065.35 1543.39,2584.65 v1(1629.92,2584.65)
  Bottom Layer w39.37: v1(767.72,2067.91) 942.32,2067.91 LEDScreen1.1
PTB23: Micro1.102
PTC0: Micro1.103
PTC1: Micro1.104
PTC2: Micro1.105
PTC3: Micro1.106
PTC4: Micro1.109
PTC5: J3.1 Micro1.110 | length 327.4
  Top Layer w10: Micro1.110 2341.54,2742.2 2341.54,2744.09 2364.17,2744.09 2394.69,2713.58 2394.69,2594.49 J3.1
PTC6: J3.2 Micro1.111 | length 278.3
  Top Layer w10: Micro1.111 2301.35,2726.53 2342.53,2767.72 2381.89,2767.72 2416.34,2733.27 2416.34,2672.84 J3.2
PTC7: J3.3 Micro1.112 | length 229.2
  Top Layer w10: Micro1.112 2335,2791.34 2397.84,2791.34 J3.3
PTC8: J3.4 Micro1.113 | length 223.5
  Top Layer w10: Micro1.113 2340.43,2824.61 J3.4
PTC9: J3.5 Micro1.114 | length 273
  Top Layer w10: Micro1.114 2353.12,2865.13 2405.1,2865.13 J3.5
PTC10: J3.6 Micro1.115 | length 334.4
  Top Layer w10: Micro1.115 2464.57,3004.42 J3.6
PTC11: J3.7 Micro1.116 | length 426.3
  Top Layer w10: Micro1.116 2402.56,2970.25 2402.56,3062.6 J3.7
PTC12: J2.4 Micro1.117 | length 571.9
  Top Layer w10: Micro1.117 2381.89,2977.42 2381.89,3207.28 2433.07,3258.46 2457.68,3258.46 J2.4
PTC13: J2.3 Micro1.118 | length 663.7
  Top Layer w10: Micro1.118 2364.17,2987.54 2364.17,3289.57 2433.07,3358.46 2457.68,3358.46 J2.3
PTC14: J2.2 Micro1.119 | length 755.6
  Top Layer w10: Micro1.119 2344.49,2995.7 2344.49,3369.88 2433.07,3458.46 2457.68,3458.46 J2.2
PTC15: J2.1 Micro1.120 | length 866.6
  Top Layer w10: Micro1.120 2322.83,3001.88 2322.83,3372.05 2381.89,3431.1 2381.89,3507.28 2433.07,3558.46 ; J2.1 2438.98,3552.56 2441.34,3550.2 J2.1@2465.55,3550.2
PTC16: Micro1.123
PTC17: Micro1.124
PTC18: Micro1.125 R1_S8.1 T1_S8.1 | length 1809.2
  Top Layer w12: T1_S8.1 610.94,2279.8 R1_S8.1 727.64,2278.54 833.66,2278.54 874.02,2318.9 1022.64,2318.9 1066.93,2274.61 v1(1165.35,2274.61) ; v1(1581.69,2627.95) 1583.66,2629.92 1811.68,2629.92 Micro1.125
  Bottom Layer w12: v1(1165.35,2274.61) 1184.06,2274.61 1537.4,2627.95 v1(1581.69,2627.95)
PTC19: Micro1.126 R1_S7.1 T1_S7.1 | length 3885.7
  Top Layer w10: Micro1.126 2120.08,2966.16 2120.08,2971.37 2297.24,3148.54 2297.24,3394.69 2331.69,3429.13 2331.69,3643.7 2361.22,3673.23 2468.5,3673.23 2528.09,3613.64 2528.09,957.06 2452.4,881.38 R1_S7.1
PTD0: ILI1.3 Micro1.127 R16.1 | length 4233.1
  Top Layer w10: Micro1.127 2273.62,3147.54 2273.62,3413.39 2303.15,3442.91 2303.15,3637.78 2354.59,3689.23 2475.13,3689.23 2544.09,3620.27 2544.09,1561.23 2874.02,1231.3 ; R16.1 2874.02,1231.3 ; v1(3010.83,1132.87) 2972.44,1132.87 2874.02,1231.3
  Bottom Layer w10: v1(3010.83,1132.87) 3045.28,1132.87 3190.75,987.4 ILI1.3
PTD1: Micro1.128 R9.2 | length 595.9
  Top Layer w10: Micro1.128 2240.16,3141.92 2240.16,3476.65 2235.24,3481.57 R9.2@2236.22,3482.56
PTD2: Micro1.129 R8.2 | length 371.1
  Top Layer w10: Micro1.129 2167.32,3096.92 2167.32,3291.62 R8.2
PTD3: Micro1.130
PTD4: ILI1.4 Micro1.131 | length 4070
  Top Layer w10: Micro1.131@2019.65,3004.92 2104.33,3089.61 2104.33,3578.72 2279.8,3754.19 2484.93,3754.19 2610.97,3628.15 2610.97,1604.72 2775.89,1439.8 2850.56,1439.8 v1(2851.38,1438.98)
  Bottom Layer w10: v1(2851.38,1438.98) 2963.58,1326.77 2963.58,1326.58 ILI1.4
PTD5: ILI1.5 Micro1.132 | length 4075.7
  Top Layer w10: Micro1.132 2083.66,3096.78 2083.66,3580.68 2275.87,3772.89 2488.86,3772.89 2629.67,3632.08 2629.67,1612.47 2747.06,1495.08 v1(2923.23,1495.08)
  Bottom Layer w10: v1(2923.23,1495.08) 2983.27,1435.04 2983.27,1385.83 3181.69,1187.4 ILI1.5
PTD6: ILI1.8 Micro1.133 | length 3931.1
  Top Layer w10: Micro1.133 2062.99,3103.94 2062.99,3582.64 2269.25,3788.89 2495.49,3788.89 2645.67,3638.71 2645.67,1635.83 2707.68,1573.82 v1(3017.72,1573.82)
  Bottom Layer w10: v1(3017.72,1573.82) 3116.34,1573.82 ILI1.8
PTD7: Micro1.136
PTD8: Micro1.137
PTD9: Micro1.138
PTD10: Micro1.139
PTD11: Micro1.140
PTD12: Micro1.141
PTD13: Micro1.142
PTD14: Micro1.143
PTD15: Micro1.144
PTE0: Micro1.1 R11.2 | length 603.7
  Top Layer w10: R11.2 1790.35,3611.22 1812.01,3589.57 1812.01,3377.97 1776.05,3342.02 1749.48,3342.02 1678.15,3270.69 1678.15,3242.02 Micro1.1
PTE1: Micro1.2 R12.2 | length 513.2
  Top Layer w10: R12.2 1778.05,3524.11 1795.28,3506.89 1795.28,3422.49 1795.53,3422.23 1795.53,3384.12 1769.42,3358.02 1742.85,3358.02 1662.15,3277.32 1662.15,3235.4 Micro1.2@1720.38,3177.17
PTE2: Micro1.3 R13.2 | length 427.7
  Top Layer w10: Micro1.3 1645.67,3218.82 1645.67,3283.46 1736.22,3374.02 1762.8,3374.02 1779.53,3390.75 1779.53,3415.35 1758.86,3436.02 1715.28,3436.02 R13.2
PTE3: Micro1.4 SDx1.3 | length 881.8
  Top Layer w10: SDx1.3@1019.69,3387.8 1019.69,3361.81 1094.09,3287.4 1354.33,3287.4 1411.42,3344.49 1569.88,3344.49 1629.67,3284.7 1629.67,3212.2 1692.54,3149.33 Micro1.4
PTE4: Micro1.7 R14.2 | length 174.7
  Top Layer w10: R14.2@1527.28,3225.86 Micro1.7
PTE5: Micro1.8 R15.2 | length 166.3
  Top Layer w10: R15.2 1501.15,3160.88 1564.42,3160.88 Micro1.8
PTE6: Micro1.9 SDx1.9 | length 988.5
  Top Layer w10: SDx1.9@1278.54,3387.8 1278.54,3566.93 1290.35,3578.74 1335.63,3578.74 1373.03,3541.34 v1(1373.03,3503.94) ; v1(1427.17,3094.49) 1437.99,3105.32 1591.54,3105.32 1622.33,3074.52 Micro1.9
  Bottom Layer w10: v1(1373.03,3503.94) 1358.27,3489.17 1358.27,3163.39 v1(1427.17,3094.49)
PTE7: Micro1.10
PTE8: Micro1.11
PTE9: Micro1.12
PTE10: Micro1.13
PTE11: Micro1.14
PTE12: Micro1.15
PTE24: Micro1.45
PTE25: Micro1.46
PTE26: Micro1.47
PTE27: Micro1.48
PTE28: Micro1.49
RMII_RXCLK: C7.1 Micro1.72 R10.2 TP3.1 XTAL.1 | length 773.2
  Top Layer w10: Micro1.72 1706.69,2079.51 1706.69,2050.2 1734.25,2022.64 1734.25,1966.81 R10.2 1692.48,1924.49 C7.1 1593.5,1878.23 1593.5,1777.56 1628.94,1742.13 XTAL.1 1750.98,1676.18 TP3.1
RST_TGTMCU_B: C5.1 J?.10 Micro1.74 R7.2 | length 2897.9
  Top Layer w10: Micro1.74 1901.69,2071.96 1985.12,2071.96 ; 1985.73,2071.36 1985.12,2071.96 ; v1(2011.81,2071.85) 2011.7,2071.96 1985.12,2071.96
  Bottom Layer w10: C5.1 132.17,1500.98 R7.2 62.28,1656.5 ; J?.10 119.69,1959.25 49.21,1888.78 49.21,1669.57 62.28,1656.5 ; v1(2011.81,2071.85) 2021.65,2062.01 2021.65,2035.43 1890.75,1904.53 1873.03,1904.53 1611.22,1642.72 284.45,1642.72 270.67,1656.5 62.28,1656.5
SDHC0_D0: R12.1 SDx1.7 | length 569.5
  Top Layer w10: SDx1.7@1191.93,3387.8 1191.93,3343.5 1213.58,3321.85 1333.66,3321.85 1536.42,3524.61 1579.02,3524.61 1579.51,3524.11 R12.1
SDHC0_D1: R11.1 SDx1.8 | length 536.4
  Top Layer w10: SDx1.8@1235.24,3387.8 1235.24,3362.79 1257.48,3340.55 1328.74,3340.55 1599.41,3611.22 R11.1
SDHC0_D2: R15.1 SDx1.1 | length 587
  Top Layer w10: SDx1.1@933.07,3387.8 933.07,3361.81 1120.67,3174.21 1293.31,3174.21 1294.29,3173.23 1316.93,3173.23 1329.72,3160.43 R15.1
SDHC0_D3: R14.1 SDx1.2 | length 507.4
  Top Layer w10: SDx1.2@978.35,3387.8 978.35,3359.84 1074.41,3263.78 1270.67,3263.78 1288.39,3246.06 R14.1
USB_CONN_DN: R3.2 USB1.2 | length 1512.4
  Top Layer w8: USB1.2@375.98,3424.61 356.3,3444.29 356.3,3500.98 358.27,3502.95 358.27,3568.9 478.35,3688.98 634.84,3688.98 690.94,3632.87 690.94,3484.37 527.34,3320.76 527.34,3246.17 698.71,3074.8 809.06,3074.8 846.46,3037.4 R3.2
  Bottom Layer w12: USB1.2@361.22,3424.6 USB1.2@365.16,3428.54
USB_CONN_DP: R4.2 USB1.3 | length 1544.7
  Top Layer w8: USB1.3@297.24,3424.61 342.3,3469.66 342.3,3508.92 344.27,3510.88 344.27,3574.7 472.55,3702.98 640.64,3702.98 704.94,3638.67 704.94,3478.57 541.34,3314.96 541.34,3251.97 704.5,3088.8 808.07,3088.8 808.07,3091.54 844.49,3127.95 933.35,3127.95 R4.2
  Bottom Layer w12: USB1.3@286.42,3428.54 USB1.3@287.4,3427.56
VBAT: C2.1 C3.1 C4.1 C6.1 C8.1 C9.1 C10.1 C15_S2.1 C91.1 C92.1 J5.2 J6.2 J?.1 Micro1.5 Micro1.16 Micro1.31 Micro1.32 Micro1.42 Micro1.43 Micro1.56 Micro1.70 Micro1.94 Micro1.108 Micro1.122 Micro1.135 R1_S6.2 R5.2 R6.2 R7.1 SDx1.4 T1_S6.3 TP2.1 U1_S2.3 | length 13340.3
  Top Layer w6: v1(773.62,2800.2) 831.69,2858.27 1127.95,2858.27 1168.03,2818.19 C3.1 1177.87,2789.37 1267.8,2789.37 Micro1.32 ; Micro1.31 Micro1.32 ; 1359.61,2725.39 1331.77,2725.39 Micro1.32 ; Micro1.94 v1(2189.88,2340.55) 2260.83,2269.6 C10.1
  Top Layer w8: 1259.84,2439.99 1259.84,2467.83 Micro1.42
  Top Layer w10: v1(347.44,1900.59) 347.44,1891.73 432.09,1807.09 562.2,1807.09 J5.2 J6.2 ; v1(350.39,1596.46) 953.46,1596.46 R6.2 1080.43,1721.46 1135.83,1721.46 1169.29,1754.92 1169.29,1830.71 1184.06,1845.47 1184.06,1890.75 v1(1182.09,1892.72) 1182.09,1964.57 1297.95,2080.43 C9.1 1349.41,2167.65 Micro1.56 1551.18,2369.42 v1(1551.18,2459.65) ; v1(1259.84,2428.15) 1259.84,2439.99 Micro1.43 ; 1359.61,2725.39 1395.67,2725.39 v1(1467.52,2797.24) ; v1(1461.61,3040.35) 1462.6,3040.35 1464.57,3038.39 1464.57,3038.02 Micro1.16 ; Micro1.5 v1(1791.1,3017.72) 1921.09,3017.72 Micro1.135 2002.95,3099.58 C4.1 ; Micro1.70 1781.5,2209.99 1781.5,2360.24 v1(1788.39,2367.13) ; v1(2072.83,2805.12) 2072.83,2807.56 Micro1.122 ; v1(2240.16,2679.13) 2241.04,2679.13 2391.73,2528.44 2391.73,2403.54 2382.87,2394.69 v1(2382.87,2384.84) ; 3322.83,2813.98 3322.83,2823.82 3322.83,2853.35 3349.41,2879.92 3496.06,2879.92 3606.5,2990.35 R1_S6.2 3616.69,3176.69 T1_S6.3
  Top Layer w12: v1(819.88,3474.41) 1029.53,3474.41 1048.23,3455.71 ; v1(1052.17,3505.91) 1052.17,3459.65 1061.02,3450.79 SDx1.4@1061.02,3402.17
  Top Layer w39.37: C2.1 1225.39,2393.7 v1(1259.84,2428.15) ; U1_S2.3 3315.94,2807.09 3322.83,2813.98 ; v1(3318.9,2827.76) v1@3322.83,2823.82
  Bottom Layer w6: v1@1788.15,3020.67 v1(1791.1,3017.72) ; C92.1 2067.64,2805.12 v1(2072.83,2805.12)
  Bottom Layer w10: J?.1 194.69,1758.86 212.6,1758.86 ; R7.1 232.01,1596.46 v1(350.39,1596.46) ; v1(347.44,1900.59) 297.24,1850.39 255.91,1850.39 237.2,1831.69 237.2,1783.46 212.6,1758.86 ; v1(1182.09,1892.72) 1181.1,1892.72 989.17,1700.79 477.14,1700.79 429.72,1748.2 410.83,1748.2 410.65,1748.03 312.01,1748.03 300.2,1759.84 300.2,1758.86 212.6,1758.86 ; v1(1461.61,3040.35) 1467.52,3034.45 v1(1467.52,2797.24) ; C91.1 v1@1788.15,3020.67 ; R5.2 1696.57,2397.36 1727.36,2428.15 ; v1(2189.88,2340.55) 2338.58,2340.55 v1(2382.87,2384.84)
  Bottom Layer w12: v1(773.62,2800.2) 772.64,2801.18 772.64,2802.17 784.09,2813.62 C6.1 784.09,3435.67 819.88,3471.46 v1(819.88,3474.41) ; C8.1 1051.46,3506.61 v1(1052.17,3505.91)
  Bottom Layer w20: C15_S2.1@3166.34,2834.65 C15_S2.1
  Bottom Layer w39.37: v1(1259.84,2428.15) 1467.52,2635.83 v1(1467.52,2797.24) 1469.49,2795.28 1568.66,2795.28 ; v1(1551.18,2459.65) 1707.68,2459.65 1732.28,2435.04 ; v1@1788.15,3020.67 1788.15,3014.76 1568.66,2795.28 ; v1(1788.39,2367.13) 1732.28,2423.23 1732.28,2435.04 ; v1(2240.16,2679.13) 2198.82,2679.13 v1(2072.83,2805.12) ; TP2.1 3531.5,2827.76 v1(3318.9,2827.76) 3190.94,2827.76 C15_S2.1 3148.62,2834.65 3148.62,2803.15 3125,2779.53 2875,2779.53 2558.07,3096.46 2558.07,3180.12 2552.17,3186.02 2428.15,3186.02 2198.82,2956.69 2198.82,2931.1 v1(2072.83,2805.12) ; 1568.66,2795.28 1617.87,2746.06 2013.78,2746.06 ; 1732.28,2435.04 2013.78,2716.54 2013.78,2746.06 ; 2013.78,2746.06 v1(2072.83,2805.12)
VOUT33_K64: C12.1 Micro1.21 TP_VOUT1.1 | length 1372.9
  Top Layer w10: C12.1 189.96,3103.35 TP_VOUT1.1 320.87,2972.44 1390.96,2972.44 Micro1.21
VREGIN_K64: Micro1.22
VSS: C1.2 C2.2 C3.2 C4.2 C5.2 C6.2 C7.2 C8.2 C9.2 C10.2 C11.2 C12.2 C13.2 C14_S1.2 C14_S2.2 C15_S1.2 C15_S2.2 C16.2 C17.2 C91.2 C92.2 D1.1 Encoder1.2 Encoder1.5 Encoder1.6 Encoder1.7 Encoder2.2 Encoder2.5 Encoder2.6 Encoder2.7 ILI1.2 J1.5 J1.SH1 J1.SH2 J1.SH3 J1.SH4 J1.SH5 J5.3 J6.3 J8.1 J?.3 J?.5 LEDScreen1.3 Micro1.6 Micro1.17 Micro1.18 Micro1.33 Micro1.34 Micro1.44 Micro1.57 Micro1.71 Micro1.93 Micro1.107 Micro1.121 Micro1.134 P1.1 S1.1 S1.2 S2.1 S2.2 S3.1 S3.2 SDx1.6 SDx1.10 SDx1.11 SDx1.12 U1_S1.1 U1_S2.1 U2.4 U3.1 U3.2 U3.3 U3.5 U3.7 U3.10 U3.12 USB1.4 USB1.5 USB1.6 XTAL.2 XTAL.4 | length 7760.9
  Top Layer w10: J5.3 J6.3 ; SDx1.6@1144.69,3399.21 v1(1144.69,3503.94) ; Micro1.121@2158.84,2864.55 Micro1.121
  Top Layer w20: v1(3671.26,2445.87) 3632.87,2484.25 P1.1 3770.67,2582.68 J1.5 3825.79,2581.69 J1.SH5@3852.36,2608.27 ; v1(3761.81,2771.65) 3792.32,2771.65 3876.97,2687.01 J1.SH5 J1.SH5@3852.36,2608.27 ; v1(3774.61,2488.19) 3776.57,2490.16 3784.45,2490.16 3852.36,2558.07 J1.SH5@3852.36,2608.27
  Bottom Layer w10: USB1.5@67.13,3535.24 173.82,3428.54 187.99,3428.54 186.02,3430.51 186.02,3500.98 297.52,3612.48 C13.2 299.21,3690.67 299.21,3780.51 310.04,3791.34 437.99,3791.34 584.45,3644.88 USB1.6@584.45,3535.24 ; J?.3 J?.5 ; Encoder2.2 252.95,36.42 173.23,36.42 131.89,77.76 Encoder2.6 Encoder2.7 498.03,604.33 Encoder2.5 ; C8.2 1141.46,3511.1 1144.69,3507.87 v1(1144.69,3503.94) ; U3.3@3085.03,3158.46 U3.3 ; Encoder1.6 Encoder1.7 ; Encoder1.2 3622.05,91.53 3676.18,37.4 3799.21,37.4 3837.6,75.79 3837.6,361.22 Encoder1.7 ; Encoder1.5 3805.12,604.33 Encoder1.7
  Bottom Layer w20: 3653.54,2463.58 v1(3671.26,2445.87) ; J1.SH1 3758.86,2503.94 v1(3774.61,2488.19) ; J1.SH2 3758.86,2768.7 v1(3761.81,2771.65)
  Bottom Layer w25: C15_S2.2 3087.6,2893.7 3113.19,2919.29 3590.55,2919.29 3661.42,2848.43 3661.42,2789.37 3616.14,2744.09 3454.72,2744.09 3401.57,2690.94 3401.57,2621.06 3397.83,2617.32 U1_S2.1
  Bottom Layer w39.37: C14_S2.2 3258.86,2494.09 ; U1_S2.1 3258.86,2560.24 3258.86,2494.09 ; U1_S1.1 3550.2,1885.83 3597.44,1838.58 C14_S1.2 3782.48,1838.58 3836.61,1892.72 3812.99,1916.34 3812.99,2227.36 3725.39,2314.96 C15_S1.2 3724.41,2392.72 v1(3671.26,2445.87) ; 3653.54,2463.58 3452.76,2463.58 3415.35,2500.98 3265.75,2500.98 3258.86,2494.09
  other v1: 2285.43,1568.9 2453.74,1706.69 2272.64,1847.44 1978.35,2041.34 2450.79,2079.72 2701.77,2340.55 1821.85,3086.61 2712.6,3357.28
XTAL32_RTC: Micro1.40 TAL_1.1 | length 477.7
  Top Layer w10: v1(1090.55,2494.09) 1230.43,2494.09 Micro1.40
  Bottom Layer w10: TAL_1.1 911.81,2672.84 v1(1090.55,2494.09)
pads on no net: ILI1.9 ILI2.1 ILI2.2 ILI2.3 ILI2.4 ILI2.5 J1.2 J1.3 J1.4 J8.None J?.7 J?.8 J?.9 SDx1.14 U3.4 U3.15

## Polygon pours and split planes (outlines as drawn)
VSS on Bottom Layer "GND" (solid, pour order 4): 0.98,0 3937.01,0 3937.01,3937.99 3936.02,3937.01 -0.98,3937.01 -0.98,1.97 0.98,0
VSS on Top Layer "GND" (solid, pour order 6): -0.98,0 0,-0.98 3937.01,-0.98 3937.01,3931.1 3929.13,3938.98 3928.15,3937.99 -0.98,3937.99 -0.98,1.97 1.97,-0.98

## Keep-outs
Keep-Out Layer:
  lines w6: 0,0 0,3937.01
  lines w10: 0,0 3937.01,0 3937.01,3937.01 0,3937.01

## Text inside footprints (layer, text, board x,y; h text height)
C6: Top Overlay "+" at 801.72,3184.63 h40 r180
C14_S1: Top Overlay "+" at 3736.94,1934.95 h40 r270
C14_S2: Top Overlay "+" at 3355.23,2368.37 h40 r180
C15_S1: Top Overlay "+" at 3628.04,2360.96 h40
C15_S2: Top Overlay "+" at 3183.97,2806.36 h40 r180
C16: Top Overlay "+" at 3783.5,2975.5 h40 r180
C18: Top Overlay "+" at 3650.5,3724.5 h40 r90
C19: Top Overlay "+" at 2815.5,3729.5 h40 r90
J8: Mechanical 13 "PCB edge" at 3492.9,4253.68 h73.82 r270; Mechanical 13 "PCB edge" at 3492.9,4253.68 h73.82 r270
J?: Top Overlay "1" at 309.15,1729.23 h73.82 r90
Micro1: Mechanical 13 "*" at 1742.75,3155.99 h50 r315; Mechanical 7 "0.866in/22mm" at 2221.77,2193.54 h25 r315; Mechanical 7 "0.787in/20mm" at 1280.51,3134.8 h25 r315; Mechanical 7 "0.787in/20mm" at 1324.71,2290.77 h25 r315; Mechanical 7 "0.866in/22mm" at 2177.58,3143.64 h25 r315; Mechanical 7 "0.03in/0.75mm" at 2415.91,2799.24 h25 r315; Mechanical 7 "0.02in/0.5mm" at 2405.37,2483.21 h25 r315; Mechanical 7 "Alt 2 Padstyle: OX90Y60D30P" at 852.71,2190.01 h50 r315; Mechanical 7 "Alt 1 Padstyle: OX60Y90D30P" at 895.14,2232.44 h50 r315; Mechanical 7 "Default Vert Padstyle: RX8p63Y57p53D0T" at 925.19,2456.94 h50 r315; Mechanical 7 "Default Horiz Padstyle: RX8p63Y57p53D0T" at 958.78,2508.21 h50 r315; Top Overlay "*" at 1687.33,3232.62 h50 r315
U1_S1: Top Overlay "3" at 3645.87,2121.46 h59.05; Top Overlay "1" at 3654.92,2026.57 h59.05
U1_S2: Top Overlay "3" at 3411.61,2687.4 h59.05; Top Overlay "1" at 3420.67,2592.52 h59.05
U3: Mechanical 13 "*" at 3124.5,3078 h50 r180; Mechanical 7 "0.05in/1.27mm" at 3005.75,3558 h25 r180; Mechanical 7 "0.05in/1.27mm" at 2804.5,3094 h25 r180; Mechanical 7 "0.413in/10.49mm" at 3541,3244 h25 r180; Mechanical 7 "0.419in/10.643mm" at 3171.5,2855 h25 r180; Mechanical 7 "0.299in/7.595mm" at 3177.75,2930 h25 r180; Mechanical 7 "Alt 2 Padstyle: OX90Y60D30P" at 2934,3938 h50 r180; Mechanical 7 "Alt 1 Padstyle: OX60Y90D30P" at 2934,3878 h50 r180; Mechanical 7 "Pin One Padstyle: RX78Y21D0T" at 2921.5,3698 h50 r180; Mechanical 7 "Default Padstyle: RX78Y21D0T" at 2921.5,3638 h50 r180; Bottom Overlay "*" at 3064.5,3040.5 h50 r180